# Altium PCB PCB1.PcbDoc
Units mm, origin at the board's own origin, x right, y up, seen from the top; angles counter-clockwise.
Board outline 65 x 65 mm, 2 copper layers (Top Layer, Bottom Layer), stack 1.3 mm thick; 40 components, 26 nets, 195 pads, 111 vias.
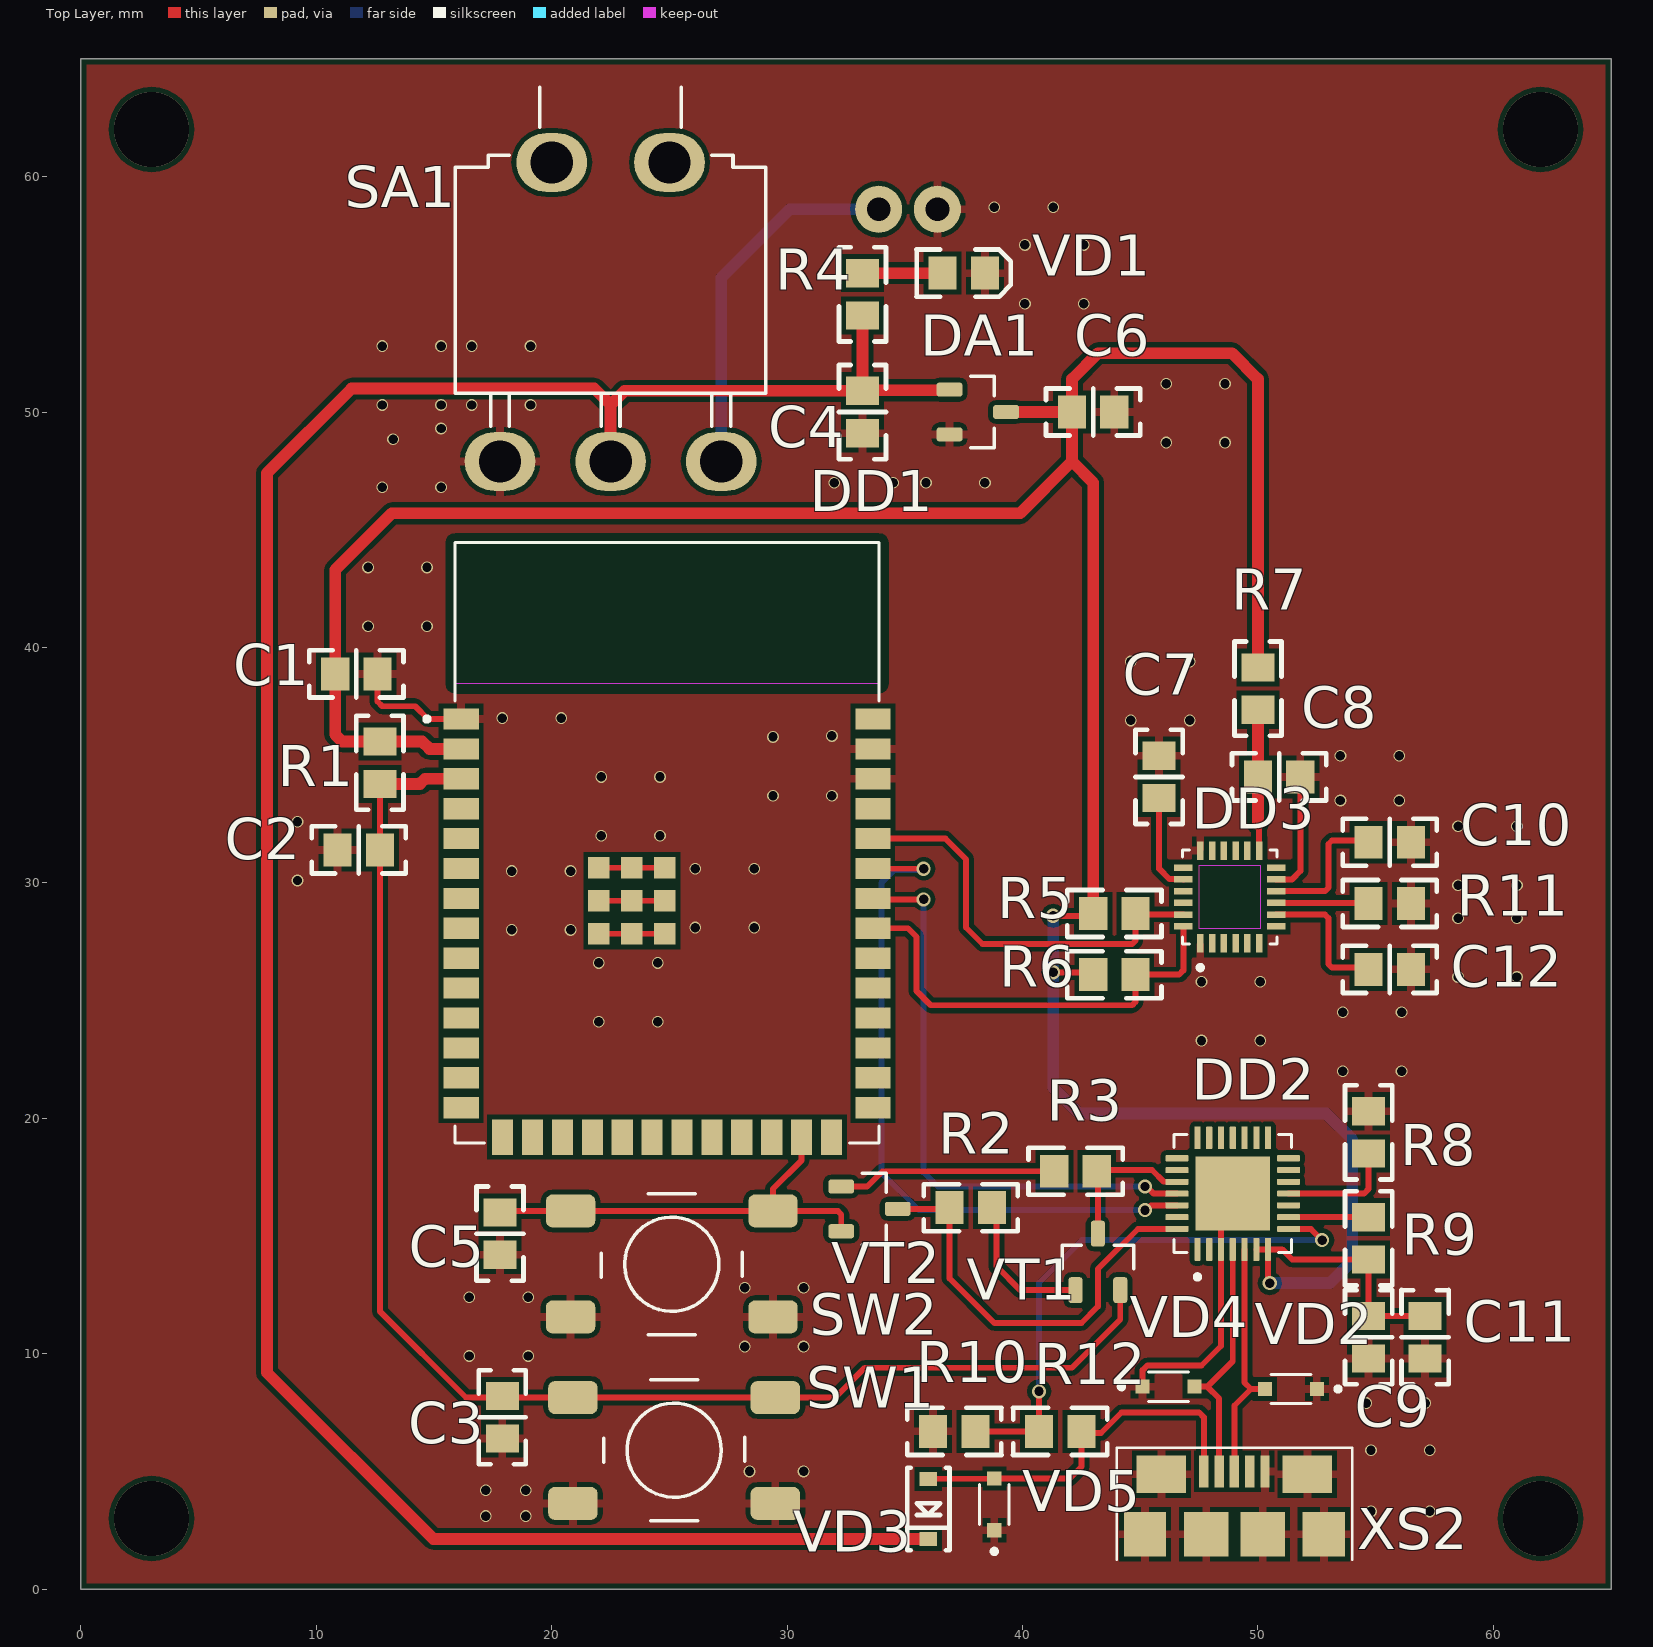
[diagram p0: Top Layer view]
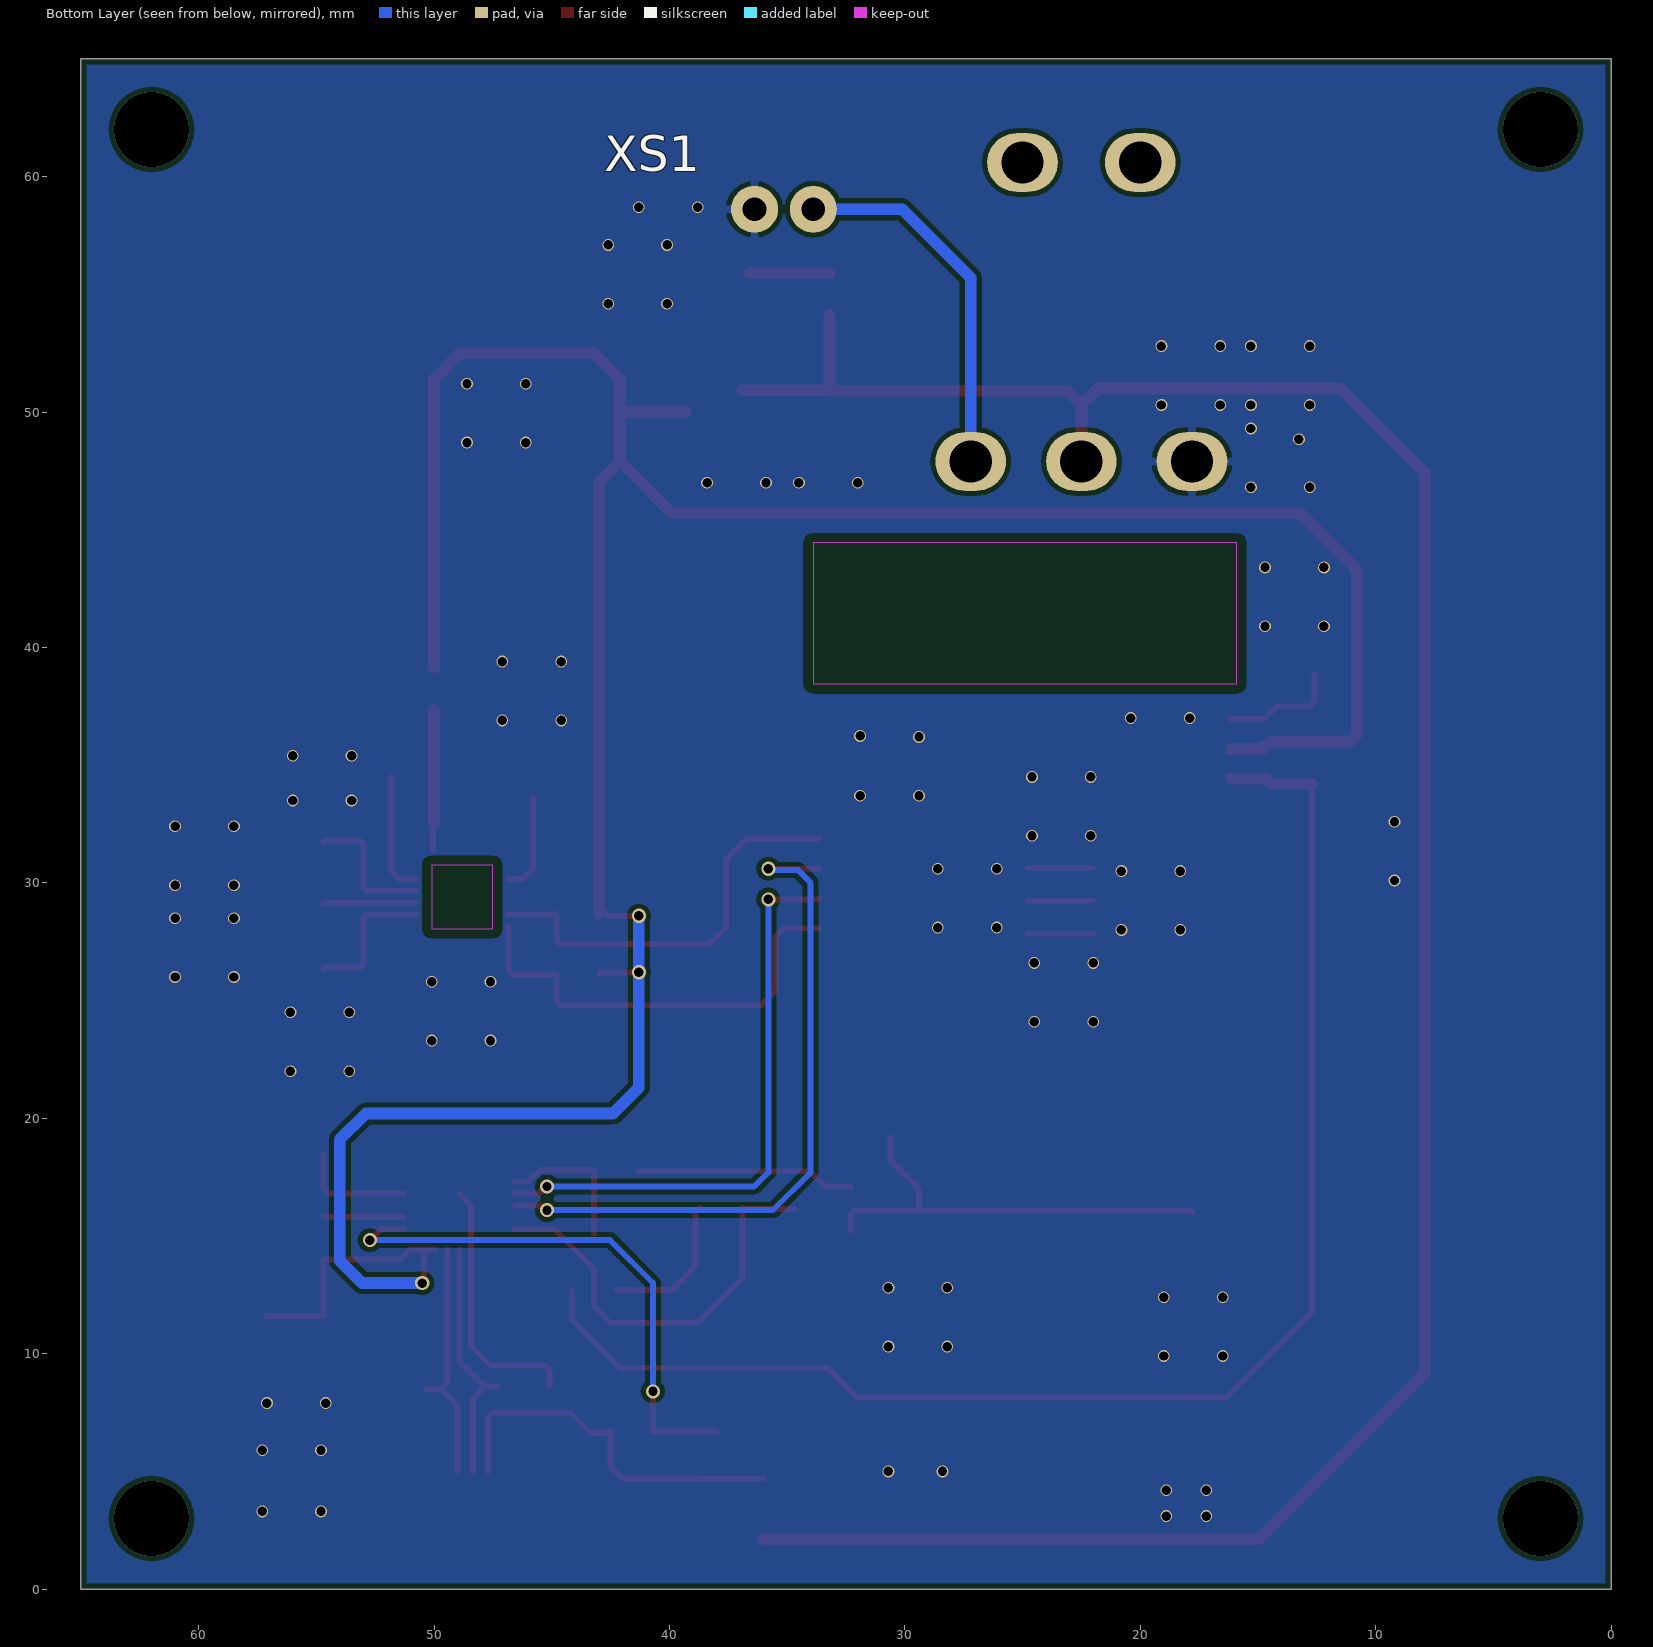
[diagram p1: Bottom Layer view, seen from below]
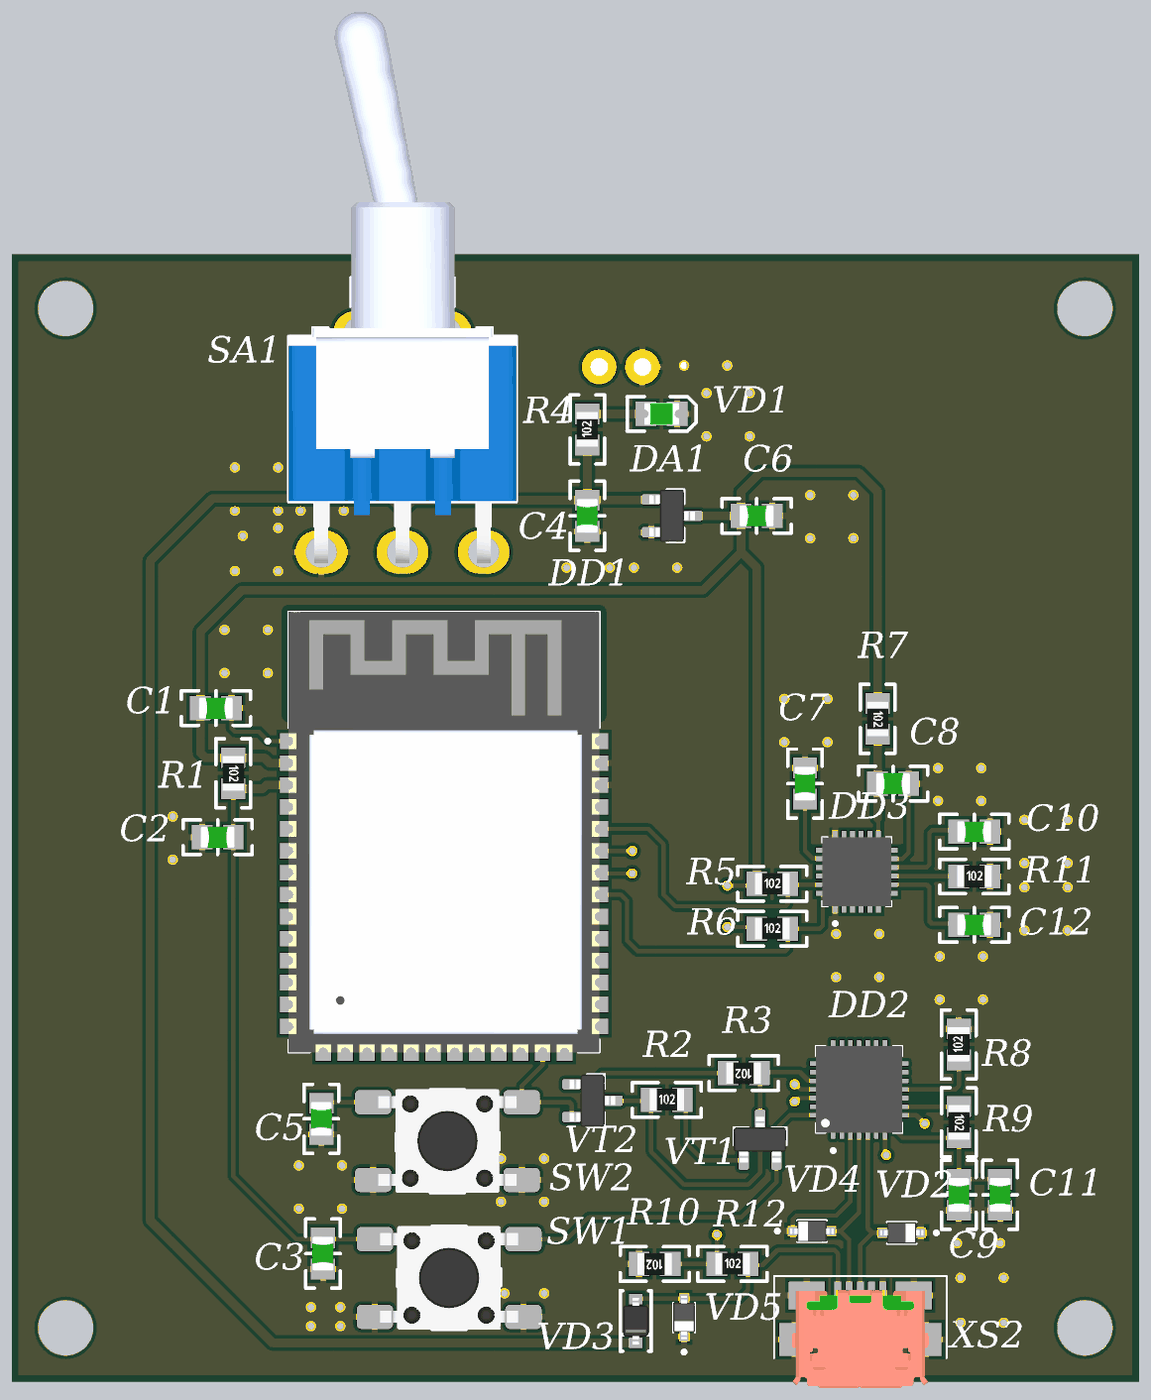
[diagram p2: 3D render of the assembled board from above, using the file's embedded part models]

## Layer stack, top to bottom
Top Solder: solder mask 0.1, Solder Resist, Dk 3.5
Top Layer: signal copper 0.4
Dielectric 1: dielectric 0.5, FR-4, Dk 4.8
Bottom Layer: signal copper 0.4
Bottom Solder: solder mask 0.1, Solder Resist, Dk 3.5

## Board outline
0,0 0,65 65,65 65,0

## Design rules (kind name [scope] priority, off if disabled: settings)
BoardOutlineClearance BoardOutlineClearance_EdgePlatingComponents [(InComponentClass('EdgePlatingComponents'))] p1: gap=0 ignorepadtopadclearanceinfootprint=FALSE
BoardOutlineClearance SilkBottom_BoardOutlineClearance [OnLayer('Bottom Overlay')] p2: gap=0 ignorepadtopadclearanceinfootprint=FALSE
BoardOutlineClearance SilkTop_BoardOutlineClearance [OnLayer('Top Overlay')] p3: gap=0 ignorepadtopadclearanceinfootprint=FALSE
BoardOutlineClearance [All] p4: gap=0.25 ignorepadtopadclearanceinfootprint=FALSE
Clearance Clearance_Keep-Out [OnLayer('Keep-Out Layer')] p1: gap=0.4 ignorepadtopadclearanceinfootprint=FALSE
Clearance Clearance_Polygon [InPolygon] p2: gap=0.2 ignorepadtopadclearanceinfootprint=FALSE
Clearance [All] p3: gap=0.15 ignorepadtopadclearanceinfootprint=FALSE
ComponentClearance [All] p1: gap=0.25 collisioncheckmode=3 verticalgap=0.25 showdistances=FALSE donotcheckwithout3dbody=TRUE
DiffPairsRouting [All] p1: maxlimit=0.4 minlimit=0.15 mostfreqgap=0.2 toplayer_minwidth=0.15 toplayer_maxwidth=0.3 toplayer_prefwidth=0.2 bottomlayer_minwidth=0.15 bottomlayer_maxwidth=0.3 bottomlayer_prefwidth=0.2 maxuncoupledlength=12.7
Height [All] p1: minheight=0 maxheight=50 prefheight=12.7
HoleSize [All] p1: absolutevalues=TRUE maxlimit=10 minlimit=0.3 maxpercent=80.000 minpercent=20.000
HoleToHoleClearance [All] p1: gap=0.2 allowstackedmicrovias=TRUE
MinimumSolderMaskSliver [All] p1: minsoldermaskwidth=0.2
PlaneClearance [All] p1: clearance=0.5
PlaneConnect [All] p1: planeconnectstyle=Relief reliefexpansion=0.5 reliefentries=4 reliefconductorwidth=0.5 reliefairgap=0.3
PolygonConnect PolygonConnect_PowerCircuits [InNetClass('PowerCircuits')] p1: connectstyle=Direct reliefconductorwidth=0.254 reliefentries=4 polygonreliefangle="90 Angle" airgapwidth=0.254
PolygonConnect PolygonConnect_Via [IsVia] p2: connectstyle=Direct reliefconductorwidth=0.254 reliefentries=4 polygonreliefangle="90 Angle" airgapwidth=0.254
PolygonConnect [All] p3: connectstyle=Relief reliefconductorwidth=0.35 reliefentries=4 polygonreliefangle="90 Angle" airgapwidth=0.2
RoutingTopology [All] p1: topology=Vertical
RoutingVias [All] p1: holewidth=0.2 width=0.4 viastyle="Through Hole" minholewidth=0.2 minwidth=0.4 maxholewidth=0.5 maxwidth=1.2
SilkToSolderMaskClearance [IsPad] p1: minsilkscreentomaskgap=0.2 clearancetoexposedcopper=TRUE
SolderMaskExpansion [All] p1: expansion=0.05 istentingtop=FALSE
Width [All] p1: maxlimit=10 minlimit=0.15 preferedwidth=0.25
20 further rules are at their usual default settings.

## Classes and differential pairs
component class Э3_diplom: C1 C4 C5 C6 C7 C8 C9 C11 C12 DA1 DD1 DD2 DD3 R1 R3 R5 R6 R7 R8 R9 R10 R12 SA1 SW1 SW2 VD1 VD2 VD3 VD4 VD5 VT1 VT2 XS1 XS2

## Components (designator, comment, footprint, x,y, rotation, side; value= is the part's Value field where it differs from the comment)
C1 "=Value" "CAP: 0805" 11.7,38.875 r0 top
C2 "=Value" "CAP: 0805" 11.8,31.4 r180 top
C3 "=Value" "CAP: 0805" 17.9,7.3 r90 top
C4 "=Value" "CAP: 0805" 33.2,50 r270 top
C5 "=Value" "CAP: 0805" 17.8,15.1 r270 top
C6 "=Value" "CAP: 0805" 43,50 r0 top
C7 "=Value" "CAP: 0805" 45.8,34.5 r90 top
C8 "=Value" "CAP: 0805" 50.9,34.5 r0 top
C9 "=Value" "CAP: 0805" 54.7,10.7 r270 top
C10 "=Value" "CAP: 0805" 55.6,31.725 r0 top
C11 "=Value" "CAP: 0805" 57.1,10.7 r270 top
C12 "=Value" "CAP: 0805" 55.6,26.325 r0 top
DA1 "AP2138N" SOT-23 38.1,50 r0 top
DD1 "ESP32-WROOM" "ESP32-S3-WROOM-1-N16R2 - duplicate" 24.9,31.7 r0 top
DD2 "CP2102" CP2102 48.93,16.8 r90 top
DD3 "MPU-6050" MPU-6050 48.8,29.4 r90 top
R1 "=Value" "RES: 0805" 12.7,35.1 r270 top
R2 "=Value" "RES: 0805" 37.8,16.2 r0 top
R3 "=Value" "RES: 0805" 42.25,17.75 r180 top
R4 "=Value" "RES: 0805" 33.2,55 r90 top
R5 "=Value" "RES: 0805" 43.9,28.7 r0 top
R6 "=Value" "RES: 0805" 43.9,26.1 r0 top
R7 "=Value" "RES: 0805" 50,38.25 r270 top
R8 "=Value" "RES: 0805" 54.7,19.4 r90 top
R9 "=Value" "RES: 0805" 54.7,14.9 r270 top
R10 "=Value" "RES: 0805" 37.1,6.7 r180 top
R11 "=Value" "RES: 0805" 55.6,29.125 r0 top
R12 "=Value" "RES: 0805" 41.6,6.7 r0 top
SA1 "Switch ON-ON" "BUT: MTS-102" 22.5,60.8 r270 top
SW1 "Button" "BUT: SMD 6x6 H4.3" 25.2,5.9 r180 top
SW2 "Button" "BUT: SMD 6x6 H4.3" 25.1,13.8 r0 top
VD1 "" "LED: 0805" 37.5,55.9 r0 top
VD2 "Suppressor-Bi" DIOD-523 51.4,8.5 r180 top
VD3 "Stab" BAT760-7 36,3.4 r270 top
VD4 "Suppressor-Bi" DIOD-523 46.2,8.6 r0 top
VD5 "Suppressor-Bi" DIOD-523 38.8,3.6 r90 top
VT1 "BJT-NPN" SOT-23 43.2,13.9 r90 top
VT2 "BJT-NPN" SOT-23 33.5,16.15 r0 top
XS1 "bat" Li-Po 35.136,58.615 r0 bottom
XS2 "USB con" MicroUSB 49,5 r0 top

## Footprints (in the part's own frame and the unit in brackets; to place one, negate y for a bottom-side part, rotate by r counter-clockwise, add the part's x,y. Pads: shape width x height; smd on the part's side, far side on the other; paste and mask are expansions set on the pad)
BAT760-7 [mm] "КД-36"
  rect 0.6x0.75 smd: 1(-1.27,0) 2(1.27,0)
  silkscreen extent -1.75,-0.9 1.75,0.9, body extent -1.35,-0.72 1.35,0.72, height 1.15
"BUT: MTS-102" [mm]
  oval 2.5x3 hole 1.8: 1(12.9,4.7) 2(12.9,0) 3(12.9,-4.7) 4(0.2,-2.5) 5(0.2,2.5)
  silkscreen extent -3,-6.6 11.4,6.6, body extent -18.38,-6.6 13.5,6.6, height 8
"BUT: SMD 6x6 H4.3" [mm]
  rrect40% 2.1x1.4 smd: 1(-4.3,2.262) 1(4.3,2.262) 2(-4.3,-2.238) 2(4.3,-2.238)
  silkscreen extent -3,-3 3,3, body extent -4,-2.99 4,3.01, height 4.3
"CAP: 0805" [mm] "Chip Resistor, Body 2.0x1.2mm, IPC Medium Density"
  rect 1.2x1.4 smd: 1(-0.9,0) 2(0.9,0)
  silkscreen extent -2,-1 2,1, body extent -1,-0.63 1,0.62, height 0.61
CP2102 [mm]
  rrect25% 0.97x0.26 smd: 1(-2.37,1.5) 2(-2.37,1) 3(-2.37,0.5) 4(-2.37,0) 5(-2.37,-0.5) 6(-2.37,-1) 7(-2.37,-1.5) 15(2.37,-1.5) 16(2.37,-1) 17(2.37,-0.5) 18(2.37,0) 19(2.37,0.5) 20(2.37,1) 21(2.37,1.5)
  rrect25% 0.26x0.97 smd: 8(-1.5,-2.37) 9(-1,-2.37) 10(-0.5,-2.37) 11(0,-2.37) 12(0.5,-2.37) 13(1,-2.37) 14(1.5,-2.37) 22(1.5,2.37) 23(1,2.37) 24(0.5,2.37) 25(0,2.37) 26(-0.5,2.37) 27(-1,2.37) 28(-1.5,2.37)
  rect 3.15x3.15 smd paste-0.575: 29(0,0)
  silkscreen extent -3.64,-2.5 2.5,2.5, body extent -2.5,-2.5 2.5,2.5, height 1
DIOD-523 [mm]
  rect 0.6x0.6 smd paste-0.05: 1(1.1,0) 2(-1.1,0)
  silkscreen extent -2.1,-0.63 0.85,0.63, body extent -1.25,-0.63 1.25,0.63, height 1.1
"ESP32-S3-WROOM-1-N16R2 - duplicate" [mm]
  rect 1.5x0.9 smd: 1(-8.75,5.26) 2(-8.75,3.99) 3(-8.75,2.72) 4(-8.75,1.45) 5(-8.75,0.18) 6(-8.75,-1.09) 7(-8.75,-2.36) 8(-8.75,-3.63) 9(-8.75,-4.9) 10(-8.75,-6.17) 11(-8.75,-7.44) 12(-8.75,-8.71) 13(-8.75,-9.98) 14(-8.75,-11.25) 27(8.75,-11.25) 28(8.75,-9.98) 29(8.75,-8.71) 30(8.75,-7.44) 31(8.75,-6.17) 32(8.75,-4.9) 33(8.75,-3.63) 34(8.75,-2.36) 35(8.75,-1.09) 36(8.75,0.18) 37(8.75,1.45) 38(8.75,2.72) 39(8.75,3.99) 40(8.75,5.26)
  rect 0.9x1.5 smd: 15(-6.985,-12.5) 16(-5.715,-12.5) 17(-4.445,-12.5) 18(-3.175,-12.5) 19(-1.905,-12.5) 20(-0.635,-12.5) 21(0.635,-12.5) 22(1.905,-12.5) 23(3.175,-12.5) 24(4.445,-12.5) 25(5.715,-12.5) 26(6.985,-12.5)
  rect 0.9x0.9 smd: 41(-2.9,-3.86) 41(-2.9,-2.46) 41(-2.9,-1.06) 41(-1.5,-3.86) 41(-1.5,-2.46) 41(-1.5,-1.06) 41(-0.1,-3.86) 41(-0.1,-2.46) 41(-0.1,-1.06)
  Keep-Out Layer region: 9,6.75 -9,6.75 -9,12.75 9,12.75
  Keep-Out Layer region: 9,6.75 -9,6.75 -9,12.75 9,12.75
  silkscreen extent -10.3,-12.75 9,12.75, body extent -9,-12.75 9,12.75, height 3.25
"LED: 0805" [mm] "Chip Resistor, Body 2.0x1.2mm, IPC Medium Density"
  rect 1.2x1.4 smd: 1(-0.9,0) 2(0.9,0)
  silkscreen extent -2,-1 2,1, body extent -1.01,-0.62 1.01,0.62, height 0.8
Li-Po [mm]
  round 2 hole 1: 1(-1.25,0) 2(1.25,0)
  body extent -3.77,-3.15 3.77,2.55, height 6.87
MicroUSB [mm] "SMD, 5 Position, Type B, Micro USB Receptacle"
  rect 0.4x1.35 smd: 1(-1.3,0) 2(-0.65,0) 3(0,0) 4(0.65,0) 5(1.3,0)
  rect 1.8x1.9 smd: 6(-3.8,-2.675) 6(3.8,-2.675)
  rect 2.1x1.6 smd: 6(-3.1,-0.125) 6(3.1,-0.125)
  rect 1.9x1.9 smd: 6(-1.2,-2.675) 6(1.2,-2.675)
  silkscreen extent -5,-3.75 5,1, body extent -3.96,-5.48 3.96,0.19, height 2.74
MPU-6050 [mm]
  rect 0.79x0.28 smd: 1(-1.97,1.25) 2(-1.97,0.75) 3(-1.97,0.25) 4(-1.97,-0.25) 5(-1.97,-0.75) 6(-1.97,-1.25) 13(1.97,-1.25) 14(1.97,-0.75) 15(1.97,-0.25) 16(1.97,0.25) 17(1.97,0.75) 18(1.97,1.25)
  rect 0.28x0.79 smd: 7(-1.25,-1.97) 8(-0.75,-1.97) 9(-0.25,-1.97) 10(0.25,-1.97) 11(0.75,-1.97) 12(1.25,-1.97) 19(1.25,1.97) 20(0.75,1.97) 21(0.25,1.97) 22(-0.25,1.97) 23(-0.75,1.97) 24(-1.25,1.97)
  Keep-Out Layer region: 1.35,-1.3 -1.35,-1.3 -1.35,1.3 1.35,1.3
  silkscreen extent -3.1,-2 2,2, body extent -2,-2 2,2, height 0.93
"RES: 0805" [mm] "Chip Resistor, Body 2.0x1.2mm, IPC Medium Density"
  rect 1.2x1.4 smd: 1(-0.9,0) 2(0.9,0)
  silkscreen extent -2,-1 2,1, body extent -0.99,-0.62 1.01,0.63, height 0.5
SOT-23 [mm]
  rrect40% 1.1x0.6 smd: 1(-1.2,0.95) 2(-1.2,-0.95) 3(1.2,0)
  silkscreen extent -0.3,-1.52 0.7,1.52, body extent -1.32,-1.52 1.32,1.52, height 1.12

## Part data
C1 C2 C3 C4 C5 C6 C7 C8 C9 C10 C11 C12: library part Cap
DA1: library part "DC-DC 3.3V", Published=13.08.2015, Publisher="Andrew Danich", Type=Микросхема
DD1: library part ESP32-WROVER-B
R1 R2 R3 R4 R5 R6 R7 R8 R9 R10 R11 R12: library part res
SA1: "Switch, ON-ON", Manufacturer="Jietong Switch", Package=MTC-102-A3, PartNumber=MTC-102
VD1: library part LED
XS2: library part "Micro USB"
VD2 VD4 VD5: Published=27.07.2015, Publisher="Andrew Danich", Type=Супрессор
VD3: Published=18.05.2010, Publisher="Andrew Danich", Type=Диод
VT1 VT2: Published=07.05.2013, Publisher="Andrew Danich", Type=Транзистор

## Via types
v1: diameter 0.5, hole 0.4, Top Layer to Bottom Layer, 98 vias
v2: diameter 0.6, hole 0.4, Top Layer to Bottom Layer, 9 vias
v3: diameter 3.2, hole 3.2, Top Layer to Bottom Layer, 4 vias

## Nets (pads, with @x,y where several pads share a name; then routed paths per layer and width w, separated by ;. In a path a pad name is that pad's centre, name@x,y a point inside that pad or via, vN(x,y) a via of type N, cw(c..) or ccw(c..) an arc to the next point about the centre after c; other vN are vias at no path point)
+3.3В: C1.1 C6.1 C9.1 C11.1 DA1.3 DD1.2 DD2.6 DD2.7 R1.1 R5.1 R6.1 R7.1 R9.2 | length 137.3
  Top Layer w0.25: v2(41.3,26.2) 42.9,26.2 R6.1 ; v2(41.3,28.6) 42.6,28.6 R5.1@42.85,28.85 ; DD2.6 DD2.7 ; v2(50.5,13) 50.5,13.068 50.43,13.138 DD2.7 ; C11.1 C9.1 R9.2 51.455,14 51.025,14.43 DD2.7
  Top Layer w0.5: DD1.2 14.81,35.69 14.5,36 R1.1 11.1,36 10.8,36.3 C1.1 10.8,43.3 13.2,45.7 39.9,45.7 42.1,47.9 ; DA1.3 C6.1 ; R5.1 43,47 42.1,47.9 ; R7.1 50,51.4 48.9,52.5 43.2,52.5 42.1,51.4 C6.1 ; 42.1,47.9 C6.1
  Bottom Layer w0.5: v2(41.3,28.6) v2(41.3,26.2) 41.3,21.3 42.4,20.2 52.9,20.2 54,19.1 54,13.95 53.05,13 v2(50.5,13)
+5В: C4.1 DA1.1 R4.1 SA1.2 VD3.2 | length 105.9
  Top Layer w0.5: SA1.2 22.5,50.307 ; R4.1 C4.1 ; VD3.2 14.97,2.13 7.9,9.2 7.9,47.4 11.5,51 21.807,51 22.5,50.307 ; DA1.1 36.875,50.925 33.225,50.925 C4.1 ; 22.5,50.307 23.093,50.9 C4.1
DTR: DD2.28 R2.1 VT2.3 | length 18.3
  Top Layer w0.25: VT2.3 36.85,16.15 R2.1 36.9,13.2 38.8,11.3 42.5,11.3 43.2,12 43.2,13.6 44.9,15.3 DD2.28
GND: C1.2 C2.2 C3.1 C4.2 C5.2 C6.2 C7.2 C8.2 C9.2 C10.2 C11.2 C12.2 DA1.2 DD1.1 DD1.38 DD1.39 DD2.3 DD2.29 DD3.1 DD3.11 DD3.18 R8.2 R10.2 R11.2 SA1.3 SW1.1 SW2.2 VD1.2 VD2.2 VD4.2 VD5.2 XS1.2 XS2.5 XS2.6 | length 21.3
  Top Layer w0.25: C1.2 12.6,37.7 12.8,37.5 14.2,37.5 14.74,36.96 DD1.1 ; VD4.2 45.1,9.3 45.3,9.5 47.6,9.5 48.43,10.33 DD2.3 48.43,16.3 DD2.29 ; DD3.11 51.45,30.15 51.8,30.5 C8.2
  other v1: 17.2,3.1 18.9,3.1 54.8,3.3 57.3,3.3 17.2,4.2 18.9,4.2 28.4,5 30.7,5 54.8,5.9 57.3,5.9 54.6,7.9 57.1,7.9 16.5,9.9 19,9.9 28.2,10.3 30.7,10.3 16.5,12.4 19,12.4 28.2,12.8 30.7,12.8 53.6,22 56.1,22 47.6,23.3 50.1,23.3 22,24.1 24.5,24.1 53.6,24.5 56.1,24.5 47.6,25.8 50.1,25.8 58.5,26 61,26 22,26.6 24.5,26.6 18.3,28 20.8,28 26.1,28.1 28.6,28.1 58.5,28.5 61,28.5 58.5,29.9 61,29.9 9.2,30.1 18.3,30.5 20.8,30.5 26.1,30.6 28.6,30.6 22.1,32 24.6,32 58.5,32.4 61,32.4 9.2,32.6 53.5,33.5 56,33.5 29.4,33.7 31.9,33.7 22.1,34.5 24.6,34.5 53.5,35.4 56,35.4 29.4,36.2 31.9,36.24 44.6,36.9 47.1,36.9 17.9,37 20.4,37 44.6,39.4 47.1,39.4 12.2,40.9 14.7,40.9 12.2,43.4 14.7,43.4 12.8,46.8 15.3,46.8 32,47 34.5,47 35.9,47 38.4,47 46.1,48.7 48.6,48.7 13.26,48.84 15.3,49.3 12.8,50.3 15.3,50.3 16.6,50.3 19.1,50.3 46.1,51.2 48.6,51.2 12.8,52.8 15.3,52.8 16.6,52.8 19.1,52.8 40.1,54.6 42.6,54.6 40.1,57.1 42.6,57.1 38.8,58.7 41.3,58.7
I2C_SCL: DD1.36 DD3.23 R5.2 | length 18
  Top Layer w0.25: DD1.36 36.72,31.88 37.6,31 37.6,28.1 38.3,27.4 44.654,27.4 44.8,27.546 R5.2 44.85,28.65 DD3.23
I2C_SDA: DD1.33 DD3.24 R6.2 | length 19
  Top Layer w0.25: DD1.33 35.13,28.07 35.5,27.7 35.5,25.4 36.1,24.8 44.654,24.8 44.8,24.946 R6.2 46.648,26.1 46.83,26.282 DD3.24
NetC1_1: C2.1 C3.2 DD1.3 R1.2 SW1.2 VT1.2 | length 61.6
  Top Layer w0.25: R1.2 C2.1 12.7,11.8 16.362,8.138 17.838,8.138 C3.2 17.962,8.138 20.9,8.138 29.5,8.138 32.038,8.138 33.3,9.4 42.1,9.4 44.15,11.45 VT1.2
  Top Layer w0.5: R1.2 14.4,34.2 14.62,34.42 DD1.3
NetC5_1: C5.1 DD1.25 SW2.1 VT2.2 | length 18.9
  Top Layer w0.25: C5.1 17.862,16.062 20.8,16.062 SW2.1@29.4,16.062 ; DD1.25 30.615,18.215 29.4,17 SW2.1@29.4,16.062 ; VT2.2 32.3,15.916 32.154,16.062 SW2.1@29.4,16.062
NetC7_1: C7.1 DD3.20 | length 4.2
  Top Layer w0.25: C7.1 45.8,30.6 46.235,30.165 46.815,30.165 DD3.20
NetC8_1: C8.1 DD3.13 R7.2 | length 5.9
  Top Layer w0.25: DD3.13 50.05,32.45
  Top Layer w0.5: 50,32.5 C8.1 R7.2
NetC11_1: C10.1 DD3.10 | length 5.9
  Top Layer w0.25: DD3.10 52.854,29.65 53,29.796 53,31.654 53.146,31.8 54.625,31.8 C10.1
NetC12_1: C12.1 DD3.8 | length 6
  Top Layer w0.25: DD3.8 52.85,28.65 53,28.5 53,26.546 53.146,26.4 54.625,26.4 C12.1
NetDD2_4: DD2.4 VD4.1 XS2.2 | length 10.6
  Top Layer w0.25: VD4.1 47.85,8.6 ; XS2.2 48.35,8.1 47.85,8.6 ; DD2.4 48.93,9.68 47.85,8.6
NetDD2_5: DD2.5 VD2.1 XS2.3 | length 10.4
  Top Layer w0.25: XS2.3 49,7.8 49.7,8.5 ; DD2.5 49.43,8.77 49.7,8.5 ; VD2.1 49.7,8.5
NetDD2_8: DD2.8 R10.1 R12.1 | length 23.4
  Top Layer w0.25: R10.1 R12.1 v2(40.7,8.4) ; DD2.8 52.248,15.3 v2(52.724,14.824)
  Bottom Layer w0.25: v2(40.7,8.4) 40.7,13.001 42.523,14.824 v2(52.724,14.824)
NetDD2_9: DD2.9 R9.1 | length 3.4
  Top Layer w0.25: DD2.9 R9.1
NetDD2_11: DD2.11 R8.1 | length 5
  Top Layer w0.25: DD2.11 54.5,16.8 54.7,17 R8.1
NetDD3_9: DD3.9 R11.1 | length 3.9
  Top Layer w0.25: DD3.9 54.675,29.15 R11.1
NetR2_2: R4.2 VD1.1 | length 3.4
  Top Layer w0.5: R4.2 VD1.1
NetR3_2: R2.2 VT1.1 | length 6.3
  Top Layer w0.25: R2.2 38.9,16 38.9,13.7 39.9,12.7 VT1.1
NetR4_2: R3.2 VT2.1 | length 9.3
  Top Layer w0.25: VT2.1 33.4,17.1 34.05,17.75 R3.2
NetSW2_1: SA1.1 XS1.1 | length 15.7
  Bottom Layer w0.5: SA1.1 27.2,55.7 30.115,58.615 XS1.1
RTS: DD2.24 R3.1 VT1.3 | length 6.3
  Top Layer w0.25: VT1.3 43.2,17.7 R3.1 43.2,17.8 45.5,17.8 45.995,17.305 46.555,17.305 DD2.24
RXD0: DD1.34 DD2.25 | length 24.9
  Top Layer w0.25: DD1.34 33.69,29.3 v2(35.8,29.3) ; v2(45.2,17.1) 45.268,17.1 45.568,16.8 DD2.25
  Bottom Layer w0.25: v2(35.8,29.3) 35.8,17.7 36.4,17.1 v2(45.2,17.1)
TXD0: DD1.35 DD2.26 | length 29.8
  Top Layer w0.25: DD1.35 33.66,30.6 v2(35.8,30.6) ; v2(45.2,16.1) 45.268,16.1 45.468,16.3 DD2.26
  Bottom Layer w0.25: v2(35.8,30.6) 35.752,30.552 34.552,30.552 34,30 34,17.7 35.6,16.1 v2(45.2,16.1)
VBUS: R12.2 VD3.1 VD5.1 XS2.1 | length 16.2
  Top Layer w0.25: VD3.1 36.015,4.685 38.785,4.685 VD5.1 42,4.7 42.5,5.2 R12.2 42.571,6.629 43.329,6.629 44.2,7.5 47.5,7.5 47.7,7.3 XS2.1
pads on no net: DD1.4 DD1.5 DD1.6 DD1.7 DD1.8 DD1.9 DD1.10 DD1.11 DD1.12 DD1.13 DD1.14 DD1.15 DD1.16 DD1.17 DD1.18 DD1.19 DD1.20 DD1.21 DD1.22 DD1.23 DD1.24 DD1.26 DD1.27 DD1.28 DD1.29 DD1.30 DD1.31 DD1.32 DD1.37 DD1.40 DD1.41 DD2.1 DD2.2 DD2.10 DD2.12 DD2.13 DD2.14 DD2.15 DD2.16 DD2.17 DD2.18 DD2.19 DD2.20 DD2.21 DD2.22 DD2.23 DD2.27 DD3.2 DD3.3 DD3.4 DD3.5 DD3.6 DD3.7 DD3.12 DD3.14 DD3.15 DD3.16 DD3.17 DD3.19 DD3.21 DD3.22 SA1.4 SA1.5 XS2.4
copper on no net: | length 8.4
  Top Layer w0.25: 22,27.84 23.4,27.84 24.8,27.84 ; 22,29.24 23.4,29.24 24.8,29.24 ; 22,30.64 23.4,30.64 24.8,30.64
  other v3: 3,3 62,3 3,62 62,62

## Polygon pours and split planes (outlines as drawn)
GND on Bottom Layer "GND_L02_P001" (solid, pour order 1): 0,-1 0,65 65,65 65,-1
GND on Top Layer "GND_L01_P000" (solid, pour order 0): 0,0 0,65 65,65 65,0

## Silkscreen, mask and mechanical layers (free items; w line width, h text height)
Board:
  the board outline again, w0.254

## Text inside footprints (layer, text, board x,y; h text height)
DD1: Mechanical 13 "ANTENNA" at 20.4,41.2 h1.27